# Altium PCB transmitter-d.PcbDoc
Units mil, origin at the board's own origin, x right, y up, seen from the top; angles counter-clockwise.
Board outline 1968.5 x 3897.64 mil, 2 copper layers (Top Layer, Bottom Layer); 32 components, 20 nets, 132 pads, 14 vias.
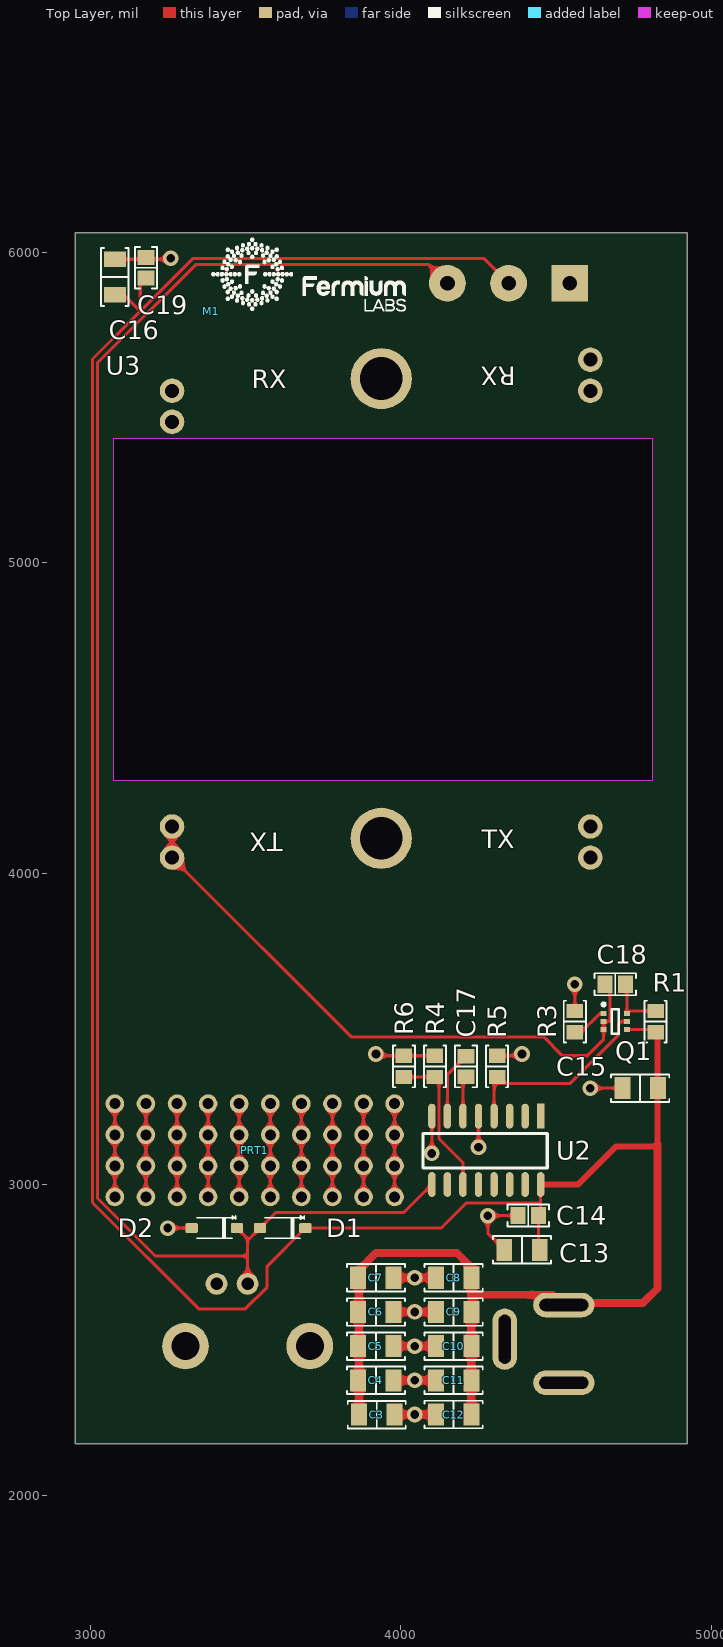
[diagram p0: Top Layer view]
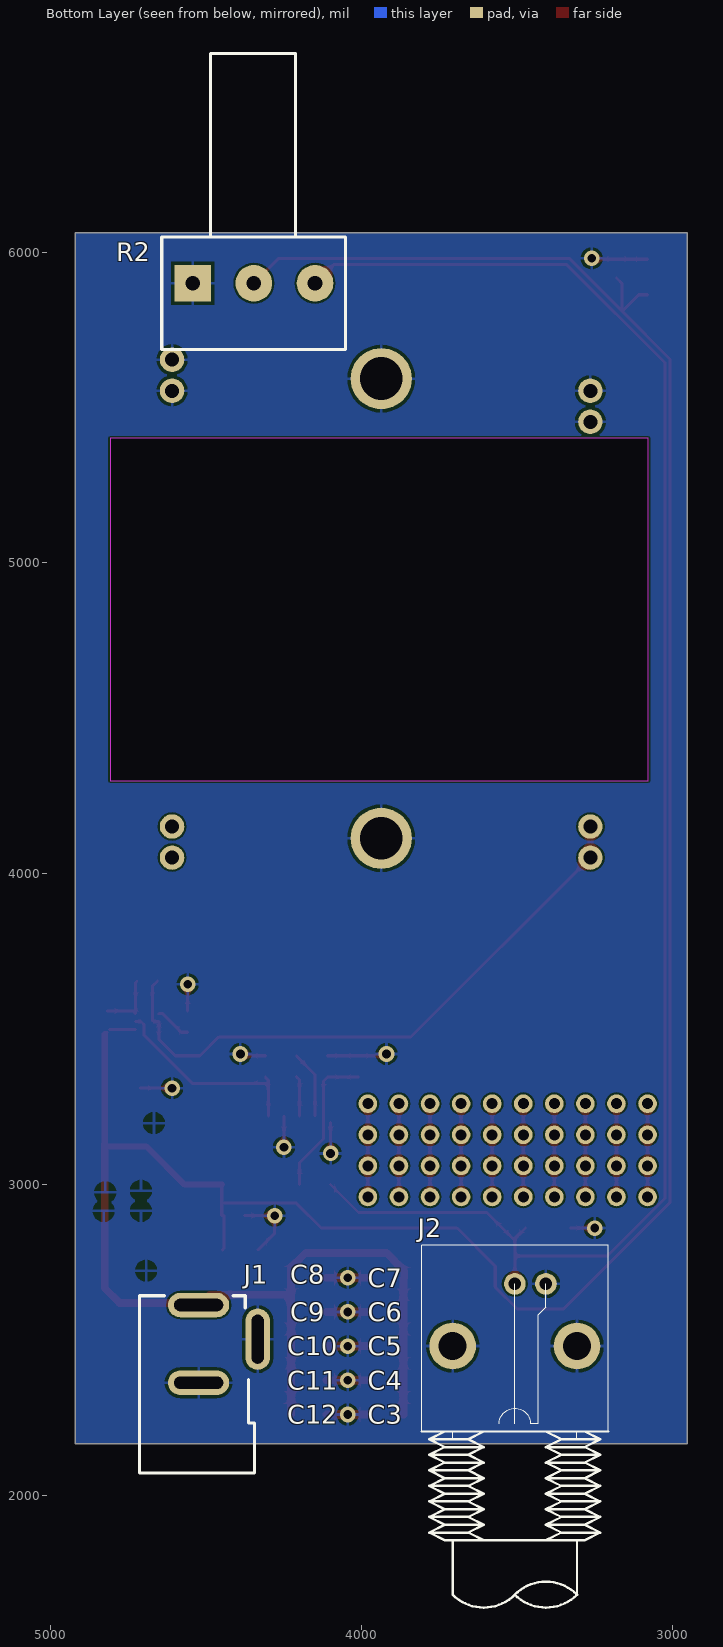
[diagram p1: Bottom Layer view, seen from below]
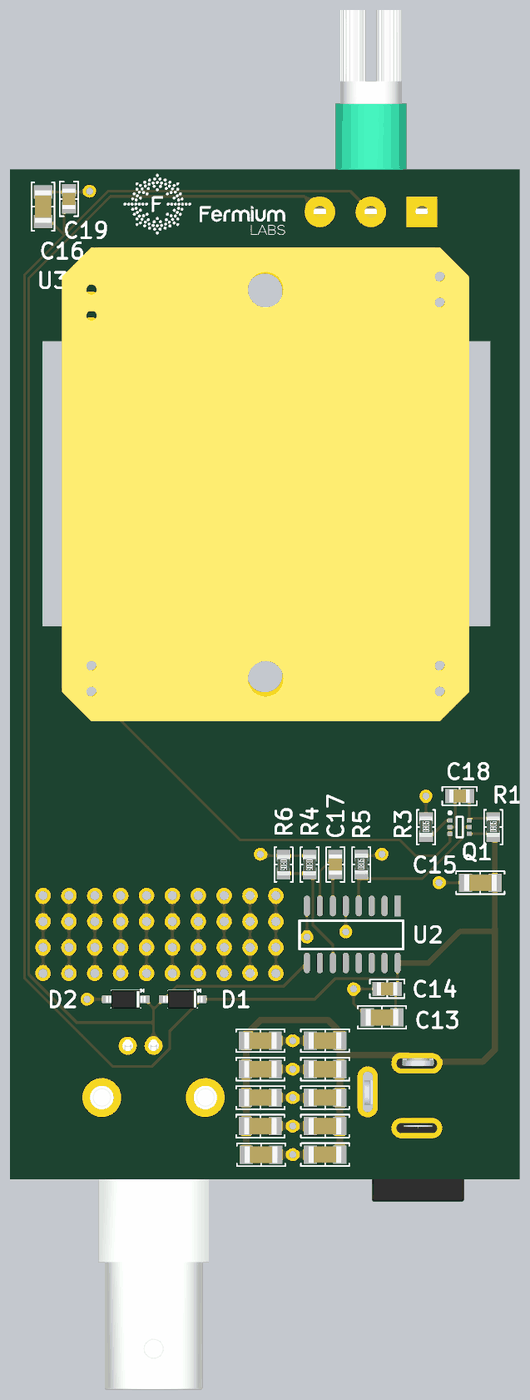
[diagram p2: 3D render of the assembled board from above, using the file's embedded part models]
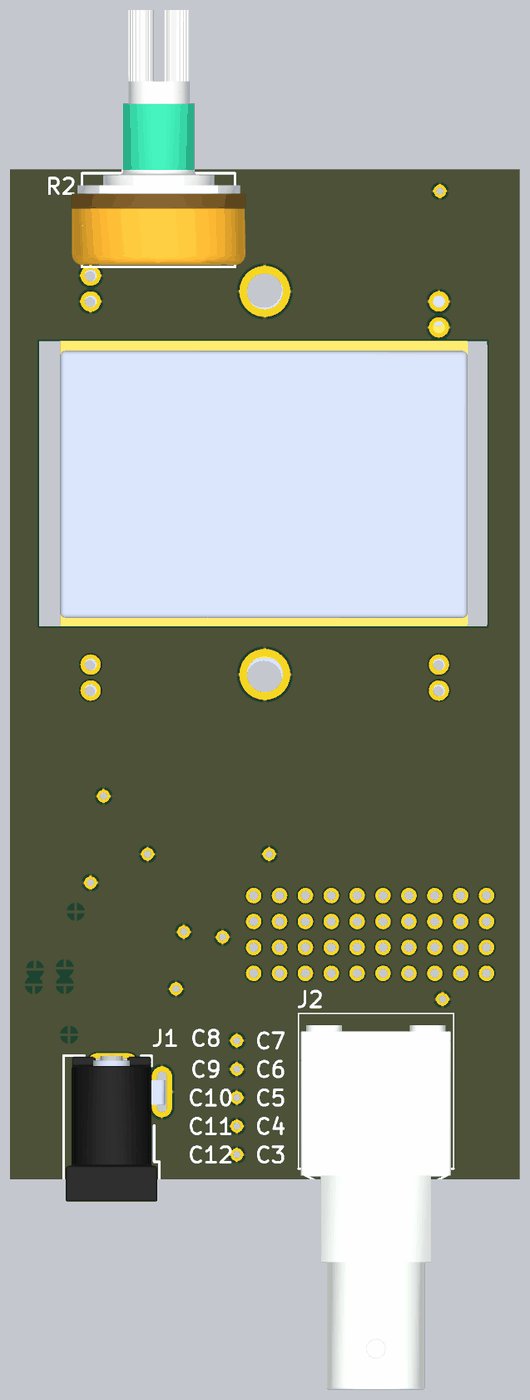
[diagram p3: 3D render of the assembled board from below, using the file's embedded part models]

## Layer stack, top to bottom
Top Solder: solder mask 0.4, Solder Resist, Dk 3.5
Top Layer: signal copper 1.4
Dielectric 1: dielectric 12.6, FR-4, Dk 4.8
Bottom Layer: signal copper 1.4
Bottom Solder: solder mask 0.4, Solder Resist, Dk 3.5

## Board outline
2952.76,2165.35 4921.26,2165.35 4921.26,6062.99 2952.76,6062.99

## Design rules (kind name [scope] priority, off if disabled: settings)
Clearance [All] p1: gap=6 ignorepadtopadclearanceinfootprint=FALSE
FanoutControl Fanout_LCC [All] p1 off: bgadir=Out bgaviamode=Centered fanoutstyle=Auto fanoutdirection=Alternating viagrid=1 // Protel DXP Scope 1 Expression Was: IsLCC   Fanout_LCC (Default Rule)
FanoutControl Fanout_BGA [All] p2 off: bgadir=Out bgaviamode=Centered fanoutstyle=Auto fanoutdirection=Alternating viagrid=1 // Protel DXP Scope 1 Expression Was: IsBGA   Fanout_BGA (Default Rule)
FanoutControl Fanout_SOIC [All] p3 off: bgadir=Out bgaviamode=Centered fanoutstyle=Auto fanoutdirection=Alternating viagrid=1 // Protel DXP Scope 1 Expression Was: IsSOIC   Fanout_SOIC (Default Rule)
FanoutControl Fanout_Default [All] p4: bgadir=Out bgaviamode=Centered fanoutstyle=Auto fanoutdirection=Alternating viagrid=1 // Fanout_Default (Default Rule)
FanoutControl Fanout_Small [All] p5 off: bgadir=Out bgaviamode=Centered fanoutstyle=Auto fanoutdirection=Alternating viagrid=1 // Protel DXP Scope 1 Expression Was: (CompPinCount < 5)   Fanout_Small (Default Rule)
HoleSize [All] p1: absolutevalues=TRUE maxlimit=99999 minlimit=11.81 maxpercent=80.000 minpercent=20.000
MinimumSolderMaskSliver [All] p1: minsoldermaskwidth=7.87
PolygonConnect [All] p1: connectstyle=Relief reliefconductorwidth=10 reliefentries=4 polygonreliefangle="90 Angle" airgapwidth=10
RoutingVias [All] p1: holewidth=28 width=50 viastyle="Through Hole" minholewidth=28 minwidth=50 maxholewidth=28 maxwidth=50
SilkToSilkClearance [All] p1: silktosilkclearance=7.87
SilkToSolderMaskClearance [All] p1 off: minsilkscreentomaskgap=10 clearancetoexposedcopper=TRUE // Protel DXP Scope 1 Expression Was: IsPad
SolderMaskExpansion [All] p1: expansion=2
Width [All] p1: maxlimit=200 minlimit=6 preferedwidth=10
21 further rules are at their usual default settings.

## Components (designator, comment, footprint, x,y, rotation, side; value= is the part's Value field where it differs from the comment)
C3 "" "CAP 1206/3216" 3922.64,2259.45 r0 top
C4 "" "CAP 1206/3216" 3920,2370 r0 top
C5 "" "CAP 1206/3216" 3920,2480 r0 top
C6 "" "CAP 1206/3216" 3920,2590 r0 top
C7 "" "CAP 1206/3216" 3920,2700 r0 top
C8 "" "CAP 1206/3216" 4170,2700 r180 top
C9 "" "CAP 1206/3216" 4170,2590 r180 top
C10 "" "CAP 1206/3216" 4170,2480 r180 top
C11 "" "CAP 1206/3216" 4170,2370 r180 top
C12 "" "CAP 1206/3216" 4170,2260 r180 top
C13 "" "CAP 1206/3216" 4390,2790 r180 top
C14 "" "CAP 0805/2012" 4410,2900 r180 top
C15 "" "CAP 1206/3216" 4770,3310 r180 top
C16 "" "CAP 1206/3216" 3080,5920 r90 top
C17 "" "CAP 0805/2012" 4210,3380 r90 top
C18 "" "CAP 0805/2012" 4690,3644.45 r180 top
C19 "" "CAP 0805/2012" 3180,5950 r90 top
D1 "" SOD123 3620,2860 r180 top
D2 "" SOD123 3400,2860 r180 top
J1 "" dc-jack 4524.56,2612.2 r270 bottom
J2 "" BNC-RA 3707.09,2480.32 r0 bottom
M1 "fermiumlabs-logo" frm-med 3390,5810 r0 top
PRT1 "protoboard" protoboard-half-inch 4080,2960 r90 top
Q1 "NTJD1155LT1" ONSC-SC70-6-419B-02_W_V 4690,3524.45 r0 top
R1 "Res1" "RES 0805/2012" 4820,3524.45 r90 top value=220K
R2 "RPot" R16148-1A 4543.7,5900 r90 bottom value=100K
R3 "Res1" "RES 0805/2012" 4560,3524.45 r90 top value=10K
R4 "Res1" "RES 0805/2012" 4110,3380 r270 top value=220K
R5 "Res1" "RES 0805/2012" 4310,3380 r90 top value=10K
R6 "Res1" "RES 0805/2012" 4010,3380 r270 top value=220K
U2 "CD74HC4046AM" SOIC16 4121.3,3183.74 r270 top
U3 "HB100" HB100-BURIED 4610,4052 r90 top

## Footprints (in the part's own frame and the unit in brackets; to place one, negate y for a bottom-side part, rotate by r counter-clockwise, add the part's x,y. Pads: shape width x height; smd on the part's side, far side on the other; paste and mask are expansions set on the pad)
BNC-RA [mil]
  round 70 hole 40: 1(-200,-200) 2(-300,-200)
  round 150 hole 90: A(0,0) B(-400,0)
  silkscreen extent -500,-325 100,842, body extent -490,-280 91,1127, height 619
"CAP 0805/2012" [mm] "Chip Capacitor, 2-Leads, Body 2.00x1.20mm, IPC Medium Density"
  rect 1.2x1.4 smd: 1(-0.838,0) 2(0.838,0)
  silkscreen extent -1.7,-0.9 1.7,0.9, body extent -1,-0.64 1,0.64, height 1.26
"CAP 1206/3216" [mm] "Chip Capacitor, 2-Leads, Body 3.25x1.60mm, IPC Medium Density"
  rect 1.3x1.8 smd: 1(-1.45,0) 2(1.45,0)
  silkscreen extent -2.37,-1.12 2.37,1.12, body extent -1.6,-0.81 1.6,0.81, height 1.62
dc-jack [mm]
  oval 2x5 hole 1 slot 4 at 90 deg: 1(0,0) 3(6.35,0)
  oval 5x2 hole 1 slot 4 at 0 deg: 2(2.794,4.826)
  silkscreen extent -0.76,-4.83 13.72,4.57, body extent -0.76,-4.62 13.54,5.13, height 11.3
frm-med [mil]
  silkscreen extent 1,1 626,237
HB100-BURIED [mm]
  round 2 hole 1.143: 1(0,34.188) 1(2.54,34.188) 2(0,0) 2(2.54,0) 3(38.151,0) 3(40.691,0) 4(35.611,34.188) 4(38.151,34.188)
  round 5 hole 3.5: 5(1.575,17.094) 5(39.141,17.094)
  Keep-Out Layer board cut-out: 6.286,38.934 34.286,38.934 34.286,-5.066 6.286,-5.066
  body extent -3.02,-3 43.48,37, height 3
ONSC-SC70-6-419B-02_W_V [mm] "SOT23, 6-Leads, Body 2x1.25mm, Pitch 0.65mm"
  rect 0.5x0.4 smd: 1(-0.95,0.65) 2(-0.95,0) 3(-0.95,-0.65) 4(0.95,-0.65) 5(0.95,0) 6(0.95,0.65)
  silkscreen extent -1.07,-1 0.3,1.52, body extent -0.63,-1 0.63,1, height 1.1
protoboard-half-inch [mil]
  round 60 hole 35.43: 1(0,1000) 1(100,1000) 1(200,1000) 1(300,1000) 2(0,900) 2(100,900) 2(200,900) 2(300,900) 3(0,800) 3(100,800) 3(200,800) 3(300,800) 4(0,700) 4(100,700) 4(200,700) 4(300,700) 5(0,600) 5(100,600) 5(200,600) 5(300,600) 6(0,500) 6(100,500) 6(200,500) 6(300,500) 7(0,400) 7(100,400) 7(200,400) 7(300,400) 8(0,300) 8(100,300) 8(200,300) 8(300,300) 9(0,200) 9(100,200) 9(200,200) 9(300,200) 10(0,100) 10(100,100) 10(200,100) 10(300,100)
R16148-1A [mm]
  rect 3x3 hole 1.2: 1(0,0)
  round 3 hole 1.2: 2(0,-5) 3(0,-10)
  silkscreen extent -5.4,-12.5 18.79,2.53, body extent -5.2,-13.55 19.8,3.55, height 20.56
"RES 0805/2012" [mm] "Chip Resistor, 2-Leads, Body 2.00x1.25mm, IPC Medium Density"
  rect 1.15x1.35 smd: 1(-0.875,0) 2(0.875,0)
  silkscreen extent -1.7,-0.9 1.7,0.9, body extent -0.95,-0.62 1.05,0.63, height 0.6
SOD123 [mm] "SOD-123; 2 Leads; Body 2.7 x 1.6 mm, (LxW)"
  round 0.508 on Mech15: 0(0,0)
  rrect25% 1x0.8 smd: A(1.85,0) K(-1.85,0)
  silkscreen extent -1.75,-1 1.45,0.85, body extent -1.95,-0.9 1.95,0.9, height 1.18
SOIC16 [mil]
  rect 80x24 smd: 1(-36.26,328.7)
  oval 80x24 smd: 2(-36.26,278.7) 3(-36.26,228.7) 4(-36.26,178.7) 5(-36.26,128.7) 6(-36.26,78.7) 7(-36.26,28.7) 8(-36.26,-21.3) 9(183.74,-21.3) 10(183.74,28.7) 11(183.74,78.7) 12(183.74,128.7) 13(183.74,178.7) 14(183.74,228.7) 15(183.74,278.7) 16(183.74,328.7)
  silkscreen extent 20,-50 130,350, body extent -56,-56 204,354, height 61

## Part data
C3 C4 C5 C6 C7 C8 C9 C10 C11 C12 C13 C15 C16: library part Cap2, "Capacitor", Capacitance=10µF, Capacitor kind=MLCC, Capacitor type=ceramic, Case - inch=1206, Case - mm=3216, Dielectric=X5R, Manufacturer=SAMSUNG, Manufacturer Part Number=CL31A106KAHNNNE, Operating temperature=-55...85°C, Operating voltage=25V, Tolerance=±10%, Category="1206 MLCC SMD Capacitors", ComponentLink1Description=http://static.tme.eu/products_pics/b/e/9/be9e0dd298dcf4979ea1dd3d226e0bfa/58780.jpg, ComponentLink1URL=http://static.tme.eu/products_pics/b/e/9/be9e0dd298dcf4979ea1dd3d226e0bfa/58780.jpg, MinAmount=100, Mounting=SMD, Multiples=100, PackageDescription=1206, PackageReference=CAPR5-4X5, Pads="2 SMD", Price Type=NET, Pricing 1="100=0.0248, 300=0.0203, 1000=0.0167, 2000=0.0131, 10000=0.0127 (EUR)", Published=23-Sep-2002, Publisher="Altium Limited", Stock 1=279700, SuppliedAmount=0, Supplier 1=TME, Supplier Part Number 1=CL31A106KAHNNNE, Unit=pcs, Weight=0.061
C14 C17 C18 C19: library part Cap2, "Capacitor", Capacitance=100nF, Capacitor kind=MLCC, Capacitor type=ceramic, Case - inch=0805, Case - mm=2012, Dielectric=X7R, Manufacturer=YAGEO, Manufacturer Part Number=CC0805JRX7R9BB104, Operating voltage=50V, Supplier Part Number 1=CC0805JRX7R9104, Tolerance=±5%, Category="0805 MLCC SMD Capacitors", ComponentLink1Description=http://static.tme.eu/products_pics/d/b/b/dbbd93eaf25225110ca26eb66da77328/58538.jpg, ComponentLink1URL=http://static.tme.eu/products_pics/d/b/b/dbbd93eaf25225110ca26eb66da77328/58538.jpg, MinAmount=100, Mounting=SMD, Multiples=100, Pads="2 SMD", Price Type=NET, Pricing 1="100=0.00613, 300=0.00464, 1000=0.00342, 4000=0.00284, 20000=0.00273 (EUR)", Stock 1=89911, SuppliedAmount=0, Supplier 1=TME, Unit=pcs, Weight=0.042
D1 D2: library part "D Schottky", "Schottky Diode", Case=SOD123, Forward voltage at If=390mV, Load current=500mA, Manufacturer="FAIRCHILD SEMICONDUCTOR", Manufacturer Part Number=MBR0520L, Off state voltage max.=20V, Category="SMD Schottky Diodes", Code_JEDEC=DO-214-AA, ComponentLink1Description=http://static.tme.eu/products_pics/e/d/b/edbd030cb344fc64745afa0f91101952/285567.jpg, ComponentLink1URL=http://static.tme.eu/products_pics/e/d/b/edbd030cb344fc64745afa0f91101952/285567.jpg, Diode type="Schottky rectifying", LatestRevisionDate=17-Jul-2002, LatestRevisionNote="Re-released for DXP Platform.", MinAmount=10, Mounting=SMD, Multiples=1, PackageDescription="DO-214-AA/SMB; 2 C-Bend Leads; Body 5.3 x 3.6 mm, inc. leads (LxW)", PackageReference=SMB, Pads="2 SMD", Price Type=NET, Pricing 1="10=0.0403, 50=0.0376, 250=0.0333, 1000=0.03, 3000=0.0281 (EUR)", Published=8-Jun-2000, Publisher="Altium Limited", Stock 1=24595, SuppliedAmount=0, Supplier 1=TME, Supplier Part Number 1=MBR0520L, Unit=pcs, Weight=0.032
J1: library part jackdc, Manufacturer=CLIFF, Manufacturer Part Number="DC-10A FC68148", Package type="in bulk", Rated current=5A, Rated voltage="12V DC", Supplier Part Number 1=FC68148, Category="DC power connectors", ComponentLink1Description=http://static.tme.eu/products_pics/f/8/e/f8eb2e1bea4ffe6692f5958f8ef9edd4/323250.jpg, ComponentLink1URL=http://static.tme.eu/products_pics/f/8/e/f8eb2e1bea4ffe6692f5958f8ef9edd4/323250.jpg, Connector=socket, Connector type="DC supply", Connector variant="with on/off switch", Contact size=5,5/2,1mm, Electrical mounting=soldering, MinAmount=1, Multiples=1, Pads="3 THT", Plug inside diameter=2.1mm, Plug outside diameter=5.5mm, Price Type=NET, Pricing 1="1=0.4194, 20=0.3065, 100=0.2581, 500=0.2258 (USD)", Spatial orientation="angled 90°", Stock 1=20287, SuppliedAmount=0, Supplier 1=TME, Unit=pcs, Weight=1.733
J2: library part BNC-PCB-RA, "connector bnc", Manufacturer="TE CONNECTIVITY", Manufacturer Part Number=1-1337543-0, Category="BNC connectors", ComponentLink1Description=http://static.tme.eu/products_pics/6/3/2/63240353f8a8790dbe8f7bd93b014c1a/378606.jpg, ComponentLink1URL=http://static.tme.eu/products_pics/6/3/2/63240353f8a8790dbe8f7bd93b014c1a/378606.jpg, Connector=socket, Connector type=BNC, Connector variant=insulated, Contact plating="gold plated", Electrical mounting=THT, Insulator material=polyester, Mechanical mounting="on PCBs", MinAmount=1, Multiples=1, Pads="4 THT", Price Type=NET, Pricing 1="1=1.22, 25=1.1, 100=0.98, 1000=0.86 (EUR)", Spatial orientation="angled 90°", Stock 1=44, SuppliedAmount=0, Supplier 1=TME, Supplier Part Number 1=1-1337543-0, Unit=pcs, Wave impedance=50O, Weight=13.22
Q1: "Power MOSFET, 8 V, +/- 1.3 A, High Side Load Switch with Level-Shift, P-Channel, 6-Pin SC70, Tape and Reel", Case/Package=SOT-363-6, Continuous Drain Current (ID)=1.3A, Current Rating=630mA, Drain to Source Breakdown Voltage=-8V, Drain to Source Resistance=260mR, Gate to Source Voltage (Vgs)=1V, Manufacturer="On Semiconductor", Manufacturer Part Number=NTJD1155LT1G, Max Operating Temperature=150°C, Max Power Dissipation=400mW, Min Operating Temperature=-55°C, On-State Resistance=130MR, Package Quantity=3000, Package type="SC-88-6 / SC-70-6 / SOT-363-6", Channel Polarity="P Channel", ComponentLink1Description="Manufacturer URL", ComponentLink1URL=http://www.onsemi.com/, ComponentLink2Description=Datasheet, ComponentLink2URL=http://www.onsemi.com/pub_link/Collateral/NTJD1155L-D.PDF, ComponentLink3Description="Package Specification", ComponentLink3URL=http://www.onsemi.com/pub_link/Collateral/SMF05C-D.PDF, ComponentLink4Description=https://datasheet.ciiva.com/30480/0900766b81206044-30480067.pdf, ComponentLink4URL=https://datasheet.ciiva.com/30480/0900766b81206044-30480067.pdf, ComponentLink5Description=https://datasheet.ciiva.com/11168/ntjd1155l-d-11168370.pdf, ComponentLink5URL=https://datasheet.ciiva.com/11168/ntjd1155l-d-11168370.pdf, ComponentLink6Description=https://datasheet.ciiva.com/929/ntjd1155l-d-929102.pdf, ComponentLink6URL=https://datasheet.ciiva.com/929/ntjd1155l-d-929102.pdf, ComponentLink7Description=https://datasheet.ciiva.com/929/ntjd1155l-d-929103.pdf, ComponentLink7URL=https://datasheet.ciiva.com/929/ntjd1155l-d-929103.pdf, ComponentLink8Description=https://datasheet.ciiva.com/929/ntjd1155l-d-929101.pdf, ComponentLink8URL=https://datasheet.ciiva.com/929/ntjd1155l-d-929101.pdf, ComponentLink9Description=https://datasheet.ciiva.com/11168/ntjd1155l-d-11168373.pdf, ComponentLink9URL=https://datasheet.ciiva.com/11168/ntjd1155l-d-11168373.pdf, ComponentLink10Description=https://datasheet.ciiva.com/26144/ntjd1155l-d-26144501.pdf, ComponentLink10URL=https://datasheet.ciiva.com/26144/ntjd1155l-d-26144501.pdf, Configuration=Dual, DatasheetVersion="Rev. 5", Element Configuration=Dual, Height=1mm, ID Max (A)=1.3, Lead Free="Lead Free", Length=2.2mm, Mounting Technology="Surface Mount", Number of Elements=2, Number of Pins=6, PackageDescription="6-Pin Small Outline Transistor, Body 2 x 1.25 mm, Pitch 0.65 mm", PackageReference=SC70-6-419B-02_W, PackageVersion="Rev. W", Packaging="Tape and Reel", Packing="Tape and Reel", PartNumber=NTJD1155LT1, Power Dissipation=400mW, Pricing 1="5=0.145, 25=0.1248, 100=0.1003, 500=0.0901, 3000=0.0841 (USD)", Radiation Hardening=No, Rds On Max=175mR, REACH SVHC="No SVHC", Stock 1=2800, Supplier 1=TME, Supplier Part Number 1=NTJD1155LT1G, Threshold Voltage=1V, V(BR)DSS Min (V)=8, VGS(th) Max (V)=1, Width=1.35mm
R1 R4 R6: "Resistor", Manufacturer="Royal Electronic Factory", Manufacturer Part Number=0805S8J0224T5E, Supplier Part Number 1=SMD0805-220K, Pricing 1="100=0.0065, 1000=0.0025, 5000=0.0009, 15000=0.0008, 50000=0.0008 (USD)", Stock 1=102100, Supplier 1=TME
R2: "Potentiometer", Supplier Part Number 1=R16148-1A-2-A100K, Supplier 1=TME
R3 R5: "Resistor", Manufacturer="Royal Electronic Factory", Manufacturer Part Number=0805S8J0103T5E, Supplier Part Number 1=SMD0805-10K, Pricing 1="100=0.0065, 1000=0.0023, 5000=0.0008, 15000=0.0008, 50000=0.0008 (USD)", Stock 1=1600500, Supplier 1=TME
U3: Manufacturer="China unspecified", Manufacturer Part Number=HB100, Supplier 1=Alibaba, Supplier Part Number 1=HB100
U2: Supplier 1=TME, Supplier Part Number 1=CD74HC4046AM

## Via types
v1: diameter 50, hole 28, Top Layer to Bottom Layer, 14 vias

## Nets (pads, with @x,y where several pads share a name; then routed paths per layer and width w, separated by ;. In a path a pad name is that pad's centre, name@x,y a point inside that pad or via, vN(x,y) a via of type N, cw(c..) or ccw(c..) an arc to the next point about the centre after c; other vN are vias at no path point)
5V: C3.1 C4.1 C5.1 C6.1 C7.1 C8.1 C9.1 C10.1 C11.1 C12.1 C13.1 C14.1 C15.1 C16.1 C19.1 D1.K J1.1 Q1.4 R1.1 R2.2 U2.16 | length 9747.6
  Top Layer w10: C16.1 3108.8,5862.91 3161.72,5810 ; C19.1 3161.72,5898.72 3161.72,5810 ; R2.2 4266.85,5980 3331.72,5980 3161.72,5810 ; C14.1 4443,2794.09 C13.1 ; C14.1@4450,2900 4450,2940 ; U2.16 4450,2940 ; Q1.4 R1.1@4811.14,3498.86 ; R1.1 R1.1@4826.27,3483.73 ; 3161.72,5810 3008.14,5656.43 3008.14,2941.86 3350,2600 3500,2600 3570,2670 3570,2737.17 D1.K 4130,2860 4210,2940 4450,2940
  Top Layer w20: U2.16 4570,3000 4692,3122 4826.27,3122 ; 4826.27,3129.73 R1.1@4826.27,3483.73
  Top Layer w25: C3.1 3865.55,2697.36 C7.1 3862.91,2722.91 3920,2780 4180,2780 4227.09,2732.91 C8.1 4227.09,2627.09 ; C12.1 C11.1 C10.1 C9.1 4227.09,2627.09 ; 4826.27,3129.73 4826.27,3122 4826.27,2666.27 4779.13,2619.13 4488.19,2619.13 4488.19,2645 4245,2645 4227.09,2627.09
GND: C3.2 C4.2 C5.2 C6.2 C7.2 C8.2 C9.2 C10.2 C11.2 C12.2 C13.2 C14.2 C15.2 C16.2 C19.2 D2.A J1.2 J1.3 J2.2 J2.A J2.B R2.1 R3.2 R4.1 R5.2 R6.1 U2.5 U2.8 U3.3 U3.4 U3.5 | length 1830
  Top Layer w10: C16.2 v1@3260,5977.09 ; v1(3250,2860) D2.A ; v1(3920,3420) 3925.55,3414.45 R6.1 R4.1 ; v1(4100,3100) U2.8@4100,3200 ; v1(4250,3120) U2.5 ; R5.2 4384.45,3414.45 v1(4390,3420) ; C13.2 4280,2842.91 v1(4280,2900) C14.2 ; R3.2 v1(4560,3644.45) ; v1(4610,3310) C15.2
  Top Layer w25: J2.A J2.A@3707.4,2480 ; C3.2@3977.09,2262.09 C3.2 3980.28,2260 v1(4045,2260) C12.2 ; C4.2 v1(4045,2370) C11.2 ; C5.2 v1(4045,2480) C10.2 ; C6.2 v1(4045,2590) C9.2 ; C7.2 v1(4045,2700) C8.2
  other v1: 3260,5980
NetC17_1: C17.1 U2.6 | length 131.1
  Top Layer w10: U2.6 4200,3337 C17.1
NetC17_2: C17.2 U2.7 | length 218.3
  Top Layer w10: U2.7 4150,3353.74 4209.26,3413 C17.2
NetC18_1: C18.1 Q1.6 R1.2 | length 202.5
  Top Layer w10: C18.1@4723,3654.45 4727.4,3650.05 Q1.6 4736.26,3558.9 R1.2
NetC18_2: C18.2 Q1.2 Q1.3 U3.1 | length 1987.5
  Top Layer w10: U3.1@3264,4152 3264,4052 3841,3475 4459.45,3475 4520,3414.45 4600,3414.45 4652.6,3467.05 Q1.3 Q1.2 4670,3524.45 4673.44,3527.89 4673.44,3638.01 C18.2@4657,3654.45
NetD1_A: D1.A D2.K J2.1 R2.3 U2.9 | length 5388.7
  Top Layer w10: D2.K 3507.09,2825.75 ; J2.1 3507.09,2770 ; U2.9 4010,2910 3597.17,2910 D1.A 3512.91,2825.75 3507.09,2825.75 ; R2.3 4090,5960 3340,5960 3024.14,5644.14 3024.14,2955.86 3210,2770 3507.09,2770 ; 3507.09,2770 3507.09,2825.75
NetQ1_1: Q1.1 R3.1 | length 119.1
  Top Layer w10: R3.1 4580,3490 4640.04,3550.04 Q1.1 Q1.1@4651.46,3548.9
NetQ1_5: Q1.5 R5.1 U2.4 | length 663.8
  Top Layer w10: U2.4 4300,3315.55 ; R5.1 4300,3335.55 4300,3315.55 ; Q1.5 4710,3524.45 4700,3514.45 4700,3480 4545.55,3325.55 4310,3325.55 4300,3315.55
NetR4_2: R4.2 R6.2 U2.11 | length 482.8
  Top Layer w10: R6.2 R4.2 4123,3332.55 4123,3147 4200,3070 U2.11
PRT1: PRT1.1 | length 300
  Top Layer w10: PRT1.1@3080,2960 3080,3060 3080,3160 PRT1.1@3080,3260
PRT2: PRT1.2 | length 300
  Top Layer w10: PRT1.2@3180,2960 3180,3060 3180,3160 PRT1.2@3180,3260
PRT3: PRT1.3 | length 300
  Top Layer w10: PRT1.3@3280,2960 3280,3060 3280,3160 PRT1.3@3280,3260
PRT4: PRT1.4 | length 300
  Top Layer w10: PRT1.4@3380,2960 3380,3060 3380,3160 PRT1.4@3380,3260
PRT5: PRT1.5 | length 300
  Top Layer w10: PRT1.5@3480,2960 3480,3060 3480,3160 PRT1.5@3480,3260
PRT6: PRT1.6 | length 300
  Top Layer w10: PRT1.6@3580,2960 3580,3060 3580,3160 PRT1.6@3580,3260
PRT7: PRT1.7 | length 300
  Top Layer w10: PRT1.7@3680,2960 3680,3060 3680,3160 PRT1.7@3680,3260
PRT8: PRT1.8 | length 300
  Top Layer w10: PRT1.8@3780,2960 3780,3060 3780,3160 PRT1.8@3780,3260
PRT9: PRT1.9 | length 300
  Top Layer w10: PRT1.9@3880,2960 3880,3060 3880,3160 PRT1.9@3880,3260
PRT10: PRT1.10 | length 300
  Top Layer w10: PRT1.10@3980,2960 3980,3060 3980,3160 PRT1.10@3980,3260
pads on no net: D1.0 D2.0 U2.1 U2.2 U2.3 U2.10 U2.12 U2.13 U2.14 U2.15 U3.2

## Polygon pours and split planes (outlines as drawn)
GND on Bottom Layer "Bottom Layer-No Net" (solid, pour order 0): 2952.76,2165.35 4921.26,2165.35 4921.26,6062.99 2952.76,6062.99

## Silkscreen, mask and mechanical layers (free items; w line width, h text height)
Mechanical 1:
  lines w10: 2952.76,2165.35 4921.26,2165.35 4921.26,6062.99 2952.76,6062.99 2952.76,2165.35 ; 3067.16,4309.65 4799.44,4309.65 4799.44,5412.02 3067.16,5412.02 3067.16,4309.65

## Text inside footprints (layer, text, board x,y; h text height)
U3: Top Overlay "RX" at 4370,5632 h60 r180; Top Overlay "TX" at 3620,4132 h60 r180; Top Overlay "TX" at 4260,4082 h60; Top Overlay "RX" at 3520,5562 h60; Mechanical 1 "## CUT CUT CUT ## / ## CUT CUT CUT ## / ## CUT CUT CUT ## / ## CUT CUT CUT ## / ## CUT CUT CUT ## / ## CUT CUT CUT ## / ## CUT CUT CUT ## / ## CUT CUT CUT ## / ## CUT CUT CUT ## / ## CUT CUT CUT ## / ## CUT CUT CUT ## / ## CUT CUT CUT ## / ## CUT CUT CUT ## / ## CUT CUT CUT ## / ## CUT CUT CUT ## / ## CUT CUT CUT ## / ## CUT CUT CUT ## / ## CUT CUT CUT ##" at 4800,4342 h60 r90